# Altium PCB PCB3.PcbDoc
Units mil, origin at the board's own origin, x right, y up, seen from the top; angles counter-clockwise.
Board outline 3774.03 x 2765.94 mil, 2 copper layers (Top Layer, Bottom Layer); 27 components, 30 nets, 112 pads, 2 vias.
Unrouted connection lines stored in the file: 1.
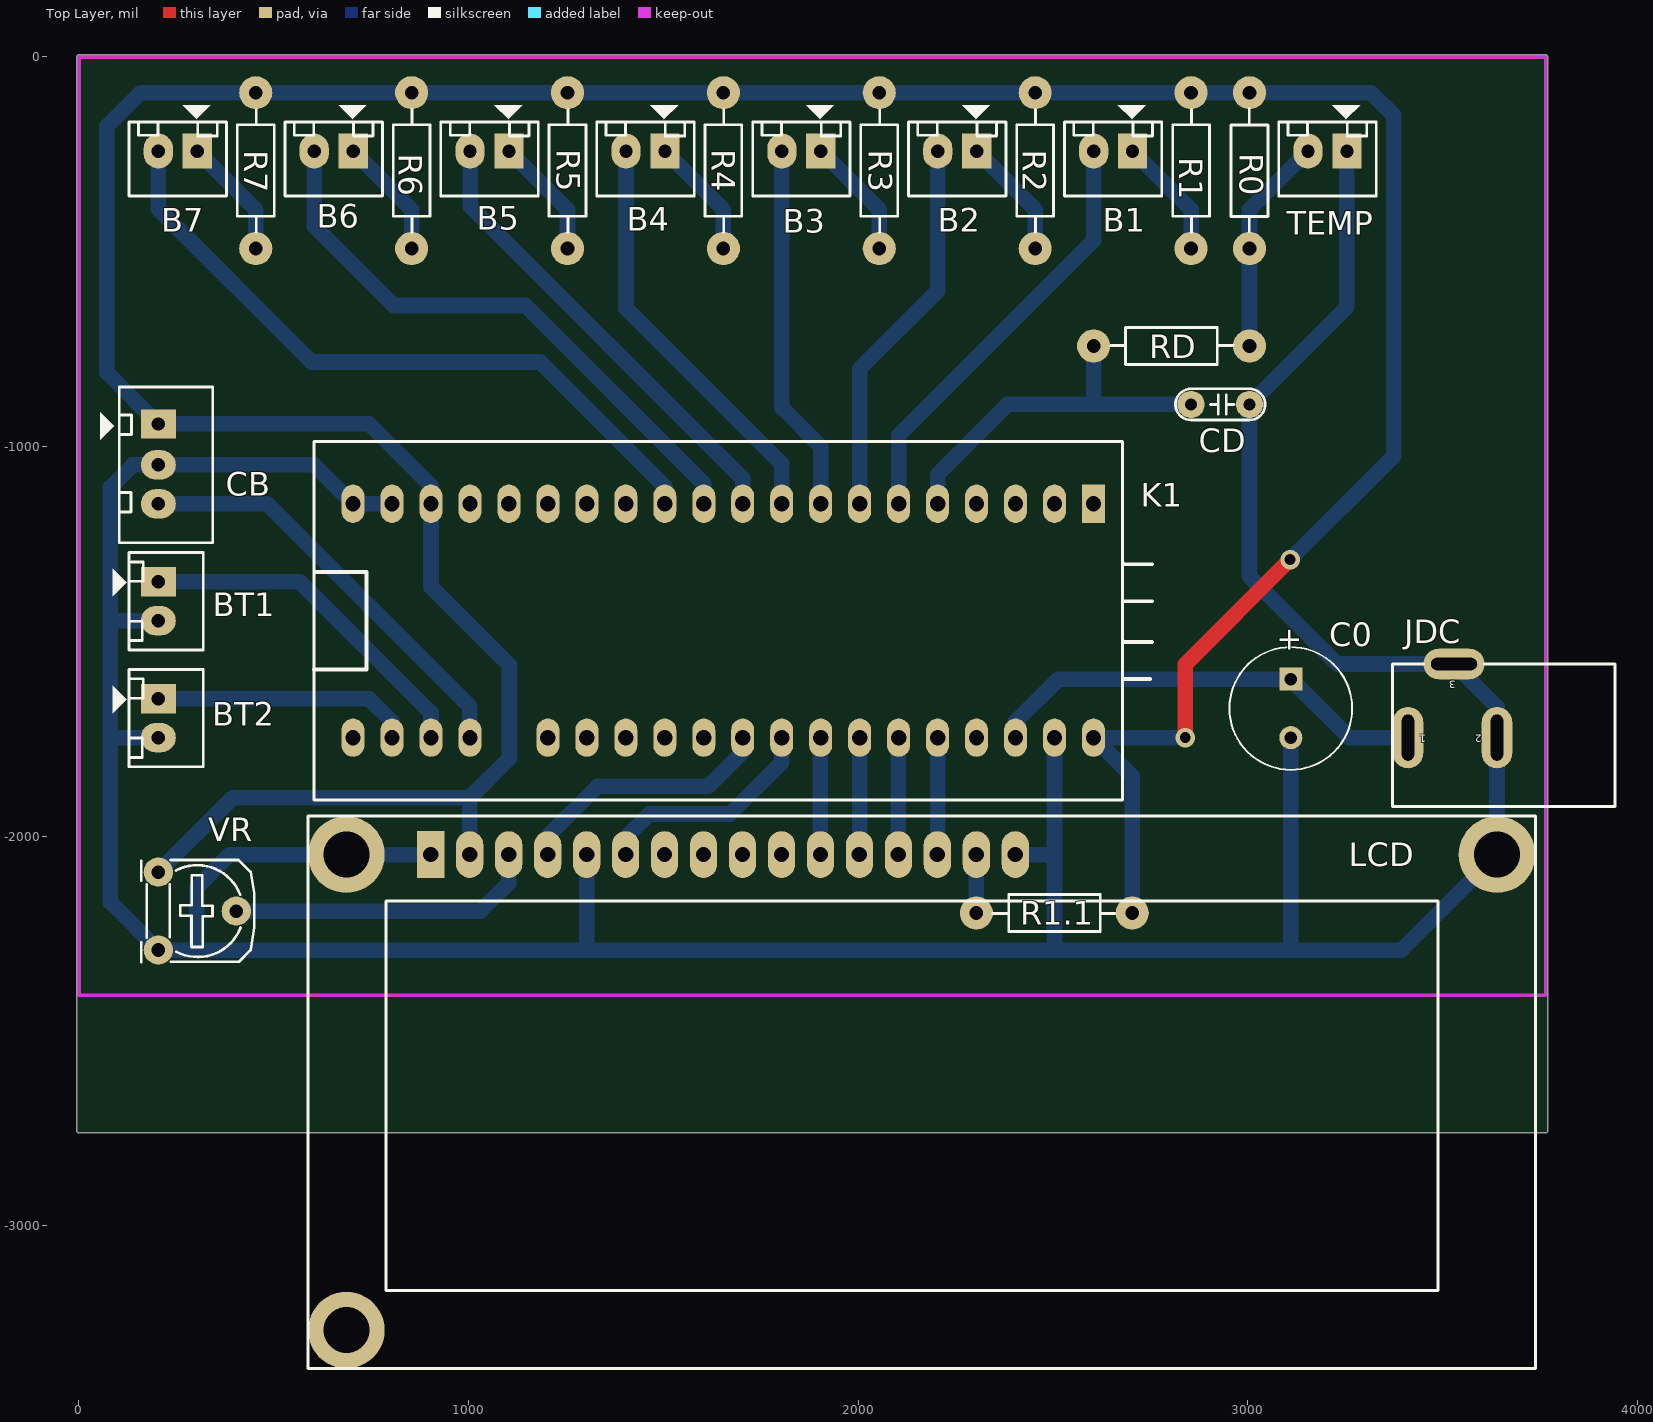
[diagram p0: Top Layer view]
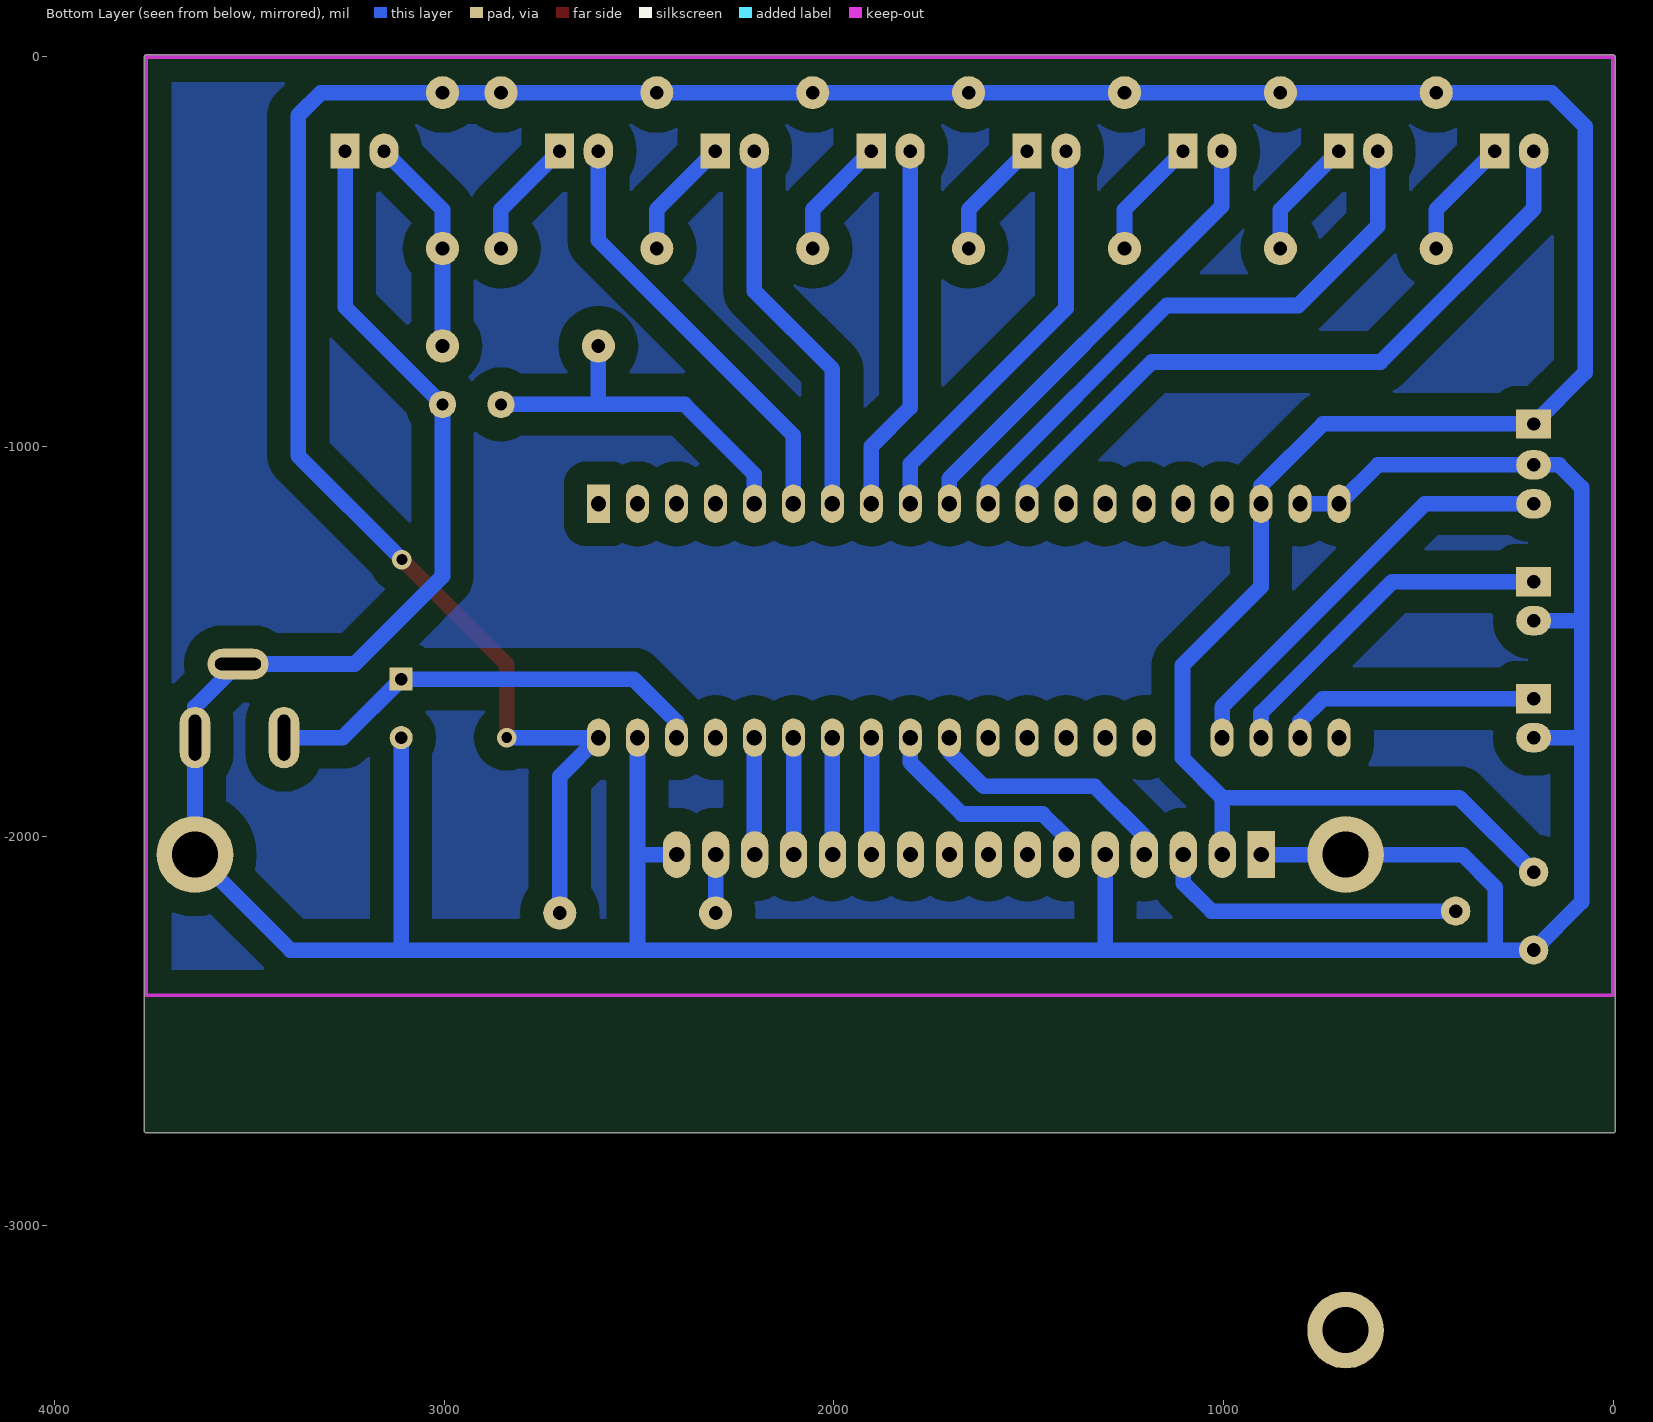
[diagram p1: Bottom Layer view, seen from below]
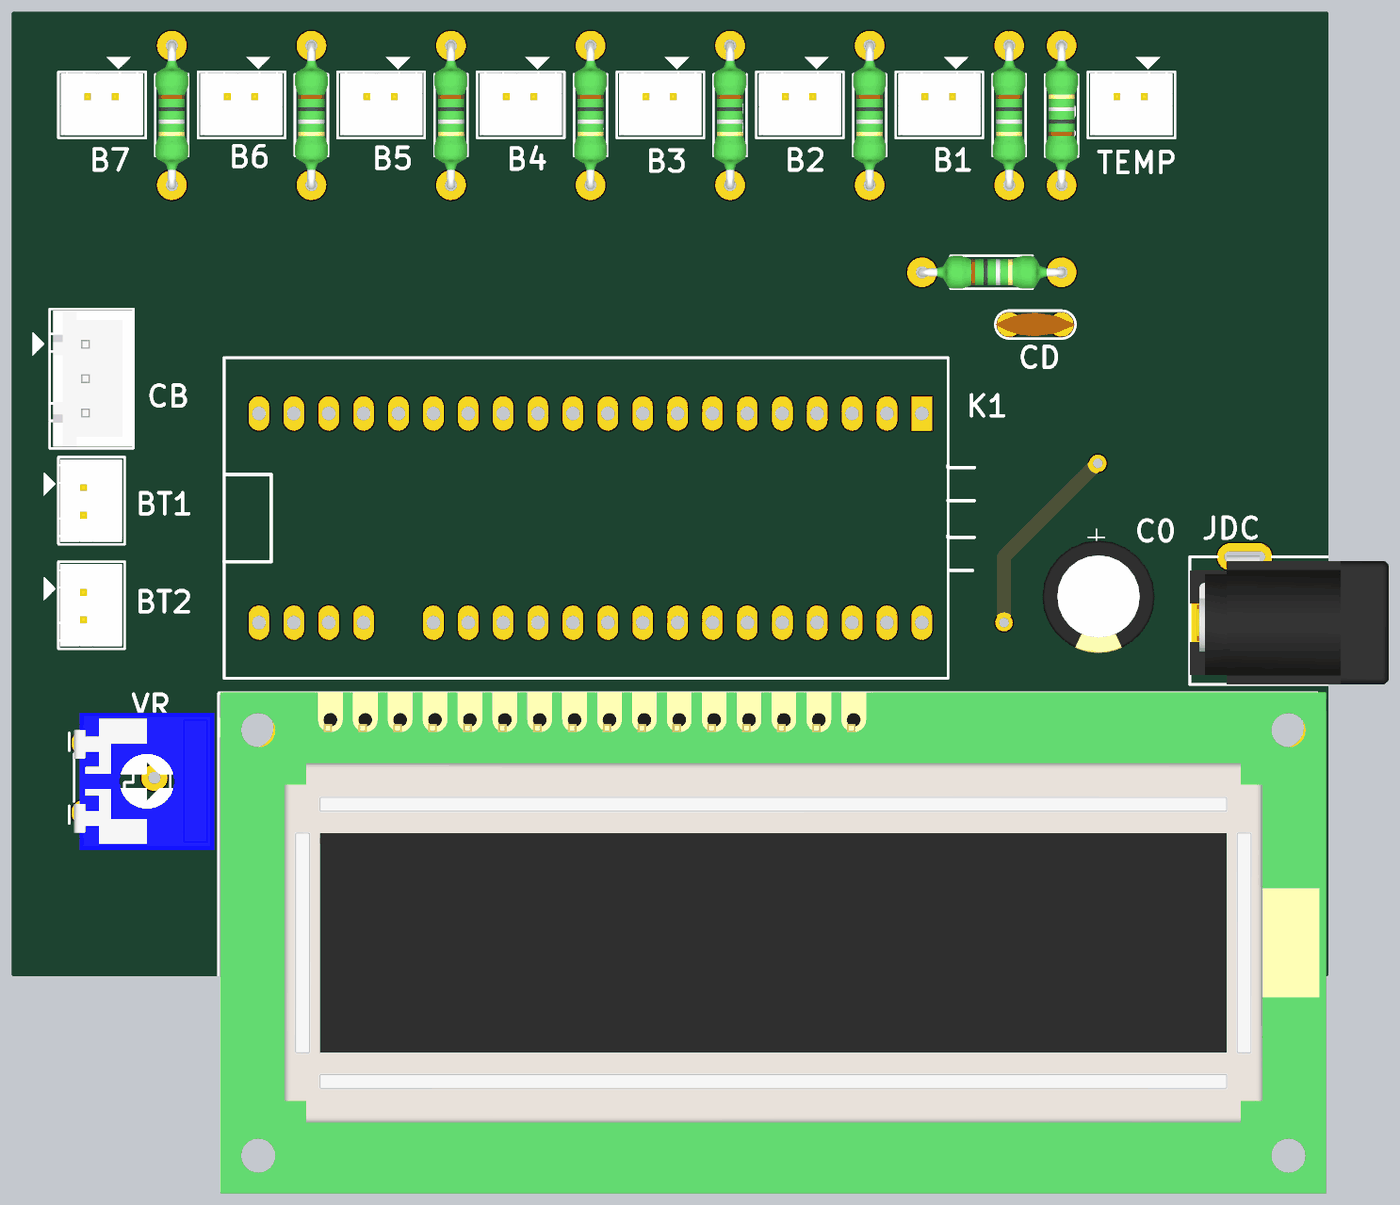
[diagram p2: 3D render of the assembled board from above, using the file's embedded part models]

## Layer stack, top to bottom
Top Solder: solder mask 0.4, Solder Resist, Dk 3.5
Top Layer: signal copper 1.4
Dielectric 1: dielectric 12.6, FR-4, Dk 4.8
Bottom Layer: signal copper 1.4
Bottom Solder: solder mask 0.4, Solder Resist, Dk 3.5

## Board outline
-5.02,-2755.91 ccw(c0,-2755.91) 0,-2760.92 3764,-2760.92 ccw(c3764,-2755.91) 3769.02,-2755.91 3769.02,0 ccw(c3764,0) 3764,5.02 0,5.02 ccw(c0,0) -5.02,0

## Design rules (kind name [scope] priority, off if disabled: settings)
Clearance [All] p1: gap=10 ignorepadtopadclearanceinfootprint=FALSE
PolygonConnect [All] p1: connectstyle=Relief reliefconductorwidth=10 reliefentries=4 polygonreliefangle="90 Angle" airgapwidth=10
RoutingVias [All] p1: holewidth=28 width=50 viastyle="Through Hole" minholewidth=28 minwidth=50 maxholewidth=28 maxwidth=50
SolderMaskExpansion [All] p1: expansion=4
Width [All] p1: maxlimit=40 minlimit=10 preferedwidth=20
30 further rules are at their usual default settings.

## Components (designator, comment, footprint, x,y, rotation, side; value= is the part's Value field where it differs from the comment)
B1 "" Header2 2704,-242 r180 top
B2 "" Header2 2304,-242 r180 top
B3 "" Header2 1904,-242 r180 top
B4 "" Header2 1504,-242 r180 top
B5 "" Header2 1104,-242 r180 top
B6 "" Header2 704,-242 r180 top
B7 "" Header2 304,-242 r180 top
BT1 "" Header2 204,-1347 r270 top
BT2 "" Header2 204,-1647 r270 top
C0 "100" CA-ALU-8 3110,-1672 r270 top value=104
CB "Header3" Header3 204,-947 r270 top
CD "101" CN1.5 2934,-892 r180 top value=33pF
JDC "Jac DC" DC5 3524.83,-1747 r180 top
K1 "STM32F103C8T6 KIT" "STM32F103C8T6 KIT" 2603.59,-1147 r270 top
LCD "LCD 16x2A" LCD16X2 903,-2047 r0 top value=LCD16x2A
R0 "100K" RES-1/4W 2999,-307 r270 top
R1 "1K" RES-1/4W 2859,-277 r90 top
R1.1 "330" RES-1/4W 2518,-2202 r0 top
R2 "1K" RES-1/4W 2459,-277 r90 top
R3 "1K" RES-1/4W 2059,-277 r90 top
R4 "1K" RES-1/4W 1659,-277 r90 top
R5 "1K" RES-1/4W 1259,-277 r90 top
R6 "1K" RES-1/4W 859,-277 r90 top
R7 "1K" RES-1/4W 459,-277 r90 top
RD "10K" RES-1/4W 2789,-737 r180 top
TEMP "" Header2 3254,-242 r180 top
VR "50K" VR-S2 204,-2092 r270 top value="Volume 50k"

## Footprints (in the part's own frame and the unit in brackets; to place one, negate y for a bottom-side part, rotate by r counter-clockwise, add the part's x,y. Pads: shape width x height; smd on the part's side, far side on the other; paste and mask are expansions set on the pad)
CA-ALU-8 [mm] "Polarized capacitors, Aluminum Electrolytic Capacitors, 2-Leads, Body 8x16x3.5x0.5"
  rect 1.5x1.5 hole 0.8: 1(-1.905,0)
  round 1.5 hole 0.8: 2(1.905,0)
  silkscreen extent -4,-4 4,4, body extent -4.1,-4.1 4.1,4.1, height 14.4
CN1.5 [mil]
  round 70 hole 31: 1(-70,0) 2(80,0)
  silkscreen extent -110,-40 120,40, body extent -110,-33 120,33, height 235
DC5 [mm] "WR-DC_DC Power Jack_Right Angled_THT Center Pin ?2.0_Plug ID ?2.05_Plug OD ?5.5"
  oval 2x4 hole 0.8 slot 3 at 90 deg: 1(2.9,0) 2(-2.9,0)
  oval 4x2 hole 0.8 slot 3 at 0 deg: 3(-0.1,-4.8)
  silkscreen extent -10.6,-4.8 3.9,4.5, body extent -10.6,-4.9 3.9,4.5, height 10.7
Header2 [mil] "CON2"
  rect 75x90 hole 34: 1(0,0)
  oval 75x90 hole 34: 2(100,0)
  silkscreen extent -75,-118 175,115, body extent -68,-70 168,107, height 236
Header3 [mil] "CON 3"
  rect 75x90 hole 34: 1(-5,0)
  oval 75x90 hole 34: 2(100,0) 3(200,0)
  silkscreen extent -100,-150 300,140, body extent -95,-90 295,136, height 276
LCD16X2 [mil] "LCD dipslay 16x2, 16 pin"
  round 196.85 hole 118.11: 1(-216.54,-1220.47) 1(-216.54,0) 1(2736.22,0)
  rect 70x120 hole 39.37: 1(0,0)
  oval 70x120 hole 39.37: 2(100,0.02) 3(200,0) 4(300,0) 5(400,0) 6(500,0) 7(600,0) 8(700,0) 9(800,0) 10(900,0) 11(1000,0) 12(1100,0) 13(1200,0) 14(1300,0) 15(1400,0) 16(1500,0)
  round 0 all layers, no hole: ""(-216.54,0)
  silkscreen extent -315,-1319 2835,98, body extent -310,-1337 2860,100, height 714
RES-1/4W [mil]
  round 85 hole 35: 1(-215,5) 2(185,5)
  silkscreen extent -173,-42 141,52, body extent -227,-42 197,52, height 95
"STM32F103C8T6 KIT" [mm]
  rect 2.5x1.5 hole 1: 1(0,0)
  oval 2.5x1.5 hole 1: 2(0,-2.54) 3(0,-5.08) 4(0,-7.62) 5(0,-10.16) 6(0,-12.7) 7(0,-15.24) 8(0,-17.78) 9(0,-20.32) 10(0,-22.86) 11(0,-25.4) 12(0,-27.94) 13(0,-30.48) 14(0,-33.02) 15(0,-35.56) 16(0,-38.1) 17(0,-40.64) 18(0,-43.18) 19(0,-45.72) 20(0,-48.26) 21(15.24,-48.26) 22(15.24,-45.72) 23(15.24,-43.18) 24(15.24,-40.64) 26(15.24,-35.56) 27(15.24,-33.02) 28(15.24,-30.48) 29(15.24,-27.94) 30(15.24,-25.4) 31(15.24,-22.86) 32(15.24,-20.32) 33(15.24,-17.78) 34(15.24,-15.24) 35(15.24,-12.7) 36(15.24,-10.16) 37(15.24,-7.62) 38(15.24,-5.08) 39(15.24,-2.54) 40(15.24,0)
  silkscreen extent -4.06,-50.8 19.3,3.81
VR-S2 [mil] "Resistor Variable"
  round 75 hole 35: 1(0,0) 2(100,200) 3(200,0)
  silkscreen extent -31,-44 231,246, body extent -87,-30 307,372, height 165

## Part data
B1 B2 B3 B4 B5 B6 B7 BT1 BT2 TEMP: library part Header2, "Header IDC, 2 x 1 Pin Vertical 2.54mm Pitch (Non-Boxed, Male)", Manufacturer="Würth Elektronik eiSos GmbH", partNo=613002143121, ComponentLink1 Description=Manufacturer, ComponentLink1URL=http://www.we-online.com, ComponentLink2 Description=Datasheet, ComponentLink2URL=http://katalog.we-online.de/em/datasheet/6130xx143121.pdf, Created by="Karrer Zheng", Created Date="29 March 2013", NoPins=02
C0: library part CN-ALU-DIP, "Capacitor (Semiconductor SIM Model)", LatestRevisionDate=17-Jul-2002, LatestRevisionNote="Re-released for DXP Platform.", PackageReference=C1206, Publisher="Altium Limited"
CB: "Header IDC, 3 x 1 Pin Vertical 2.54mm Pitch (Non-Boxed, Male)", Manufacturer="Würth Elektronik eiSos GmbH", partNo=613002143121, ComponentLink1 Description=Manufacturer, ComponentLink1URL=http://www.we-online.com, ComponentLink2 Description=Datasheet, ComponentLink2URL=http://katalog.we-online.de/em/datasheet/6130xx143121.pdf, Created by="Karrer Zheng", Created Date="29 March 2013", NoPins=02
CD: library part CN
JDC: library part DCIN, "Jac DC input"
LCD: library part LCD16x2A, "LCD dipslay 16 char, 2 line"
R0 R1 R1.1 R2 R3 R4 R5 R6 R7 RD: library part Res, "Res", Manufacturer="Generic Components", Class=Passive, Published=08/06/2000, Publisher="Altium Hobart Technology Centre", SubClass=R
VR: library part VR-S, "Var Resistor"

## Via types
v1: diameter 50, hole 28, Top Layer to Bottom Layer, 2 vias

## Nets (pads, with @x,y where several pads share a name; then routed paths per layer and width w, separated by ;. In a path a pad name is that pad's centre, name@x,y a point inside that pad or via, vN(x,y) a via of type N, cw(c..) or ccw(c..) an arc to the next point about the centre after c; other vN are vias at no path point)
3V3: CB.1 K1.18 K1.40 LCD.2 R0.1 R1.1.2 R1.2 R2.2 R3.2 R4.2 R5.2 R6.2 R7.2 VR.1 | length 9441
  Top Layer w40: v1(2839,-1747) 2839,-1559 v1(3108,-1290)
  Bottom Layer w40: VR.1 395,-1901 1003,-1901 ; LCD.2 1003,-1901 ; R1.1.2 2703,-1846.41 K1.40 v1(2839,-1747) ; v1(3108,-1290) 3374,-1024 3374,-150 3316,-92 R0.1 R1.2 R2.2 R3.2 R4.2 R5.2 R6.2 R7.2 158,-92 72,-178 72,-810 CB.1 745,-942 903.59,-1100.59 K1.18 903.59,-1359.59 1105,-1561 1105,-1799 1003,-1901
5V: C0.1 JDC.1 K1.38 | length 1155.1
  Bottom Layer w40: K1.38 2403.59,-1706.41 2513,-1597 C0.1 3260,-1747 JDC.1
B1: B1.2 K1.6 | length 1112.3
  Bottom Layer w40: K1.6 2103.59,-971.41 2604,-471 B1.2
B2: B2.2 K1.7 | length 988
  Bottom Layer w40: K1.7 2003.59,-801.41 2204,-601 B2.2
B3: B3.2 K1.8 | length 946.3
  Bottom Layer w40: B3.2 1804,-900 1903.59,-999.59 K1.8
B4: B4.2 K1.9 | length 1070.5
  Bottom Layer w40: B4.2 1404,-645 1803.59,-1044.59 K1.9
B5: B5.2 K1.10 | length 1194.8
  Bottom Layer w40: B5.2 1004,-383 1703.59,-1082.59 K1.10
B6: B6.2 K1.11 | length 1517
  Bottom Layer w40: B6.2 604,-434 808,-638 1146,-638 1603.59,-1095.59 K1.11
B7: B7.2 K1.12 | length 1787.2
  Bottom Layer w40: B7.2 204,-390 597,-783 1184,-783 1503.59,-1102.59 K1.12
D4: K1.33 LCD.11 | length 300.2
  Bottom Layer w40: LCD.11 1903,-1747.59 K1.33
D5: K1.34 LCD.12 | length 300.2
  Bottom Layer w40: LCD.12 2003.59,-2046.41 K1.34
D6: K1.35 LCD.13 | length 300.2
  Bottom Layer w40: LCD.13 2103,-1747.59 K1.35
D7: K1.36 LCD.14 | length 300.2
  Bottom Layer w40: LCD.14 2203.59,-2046.41 K1.36
EN: K1.32 LCD.6 | length 587.2
  Bottom Layer w40: LCD.6 1403,-2004 1464,-1943 1671,-1943 1803.59,-1810.41 K1.32
GND: BT1.2 BT2.2 C0.2 CB.2 CD.1 JDC.2 JDC.3 K1.19 K1.20 K1.39 LCD.1 LCD.5 LCD.16 TEMP.1 VR.3 | length 10389.4
  Bottom Layer w40: BT2.2 81,-1747 ; BT1.2 81,-1447 ; K1.19 K1.20 603.59,-1047 CB.2 139,-1047 81,-1105 81,-1447 ; LCD.1@903,-2047 686.46,-2047 387,-2047 303,-2131 303,-2292 ; LCD.5 1303,-2287 1308,-2292 ; LCD.16 2503.59,-2047 ; K1.39 2503.59,-2047 ; C0.2 3110,-2292 ; TEMP.1 3254,-642 CD.1 3004,-1333 3229.02,-1558.02 JDC.3 3639,-1668.26 JDC.2 3639,-2046.78 3639.22,-2047 3394.22,-2292 3110,-2292 ; 81,-1747 81,-1447 ; 81,-1747 81,-2169 VR.3 303,-2292 ; 303,-2292 1308,-2292 ; 1308,-2292 2503.59,-2292 ; 2503.59,-2292 3110,-2292 ; 2503.59,-2292 2503.59,-2047
NetB1_1: B1.1 R1.1 | length 312.1
  Bottom Layer w40: B1.1 2854,-392 R1.1
NetB2_1: B2.1 R2.1 | length 312.1
  Bottom Layer w40: B2.1 2454,-392 R2.1
NetB3_1: B3.1 R3.1 | length 312.1
  Bottom Layer w40: B3.1 2054,-392 R3.1
NetB4_1: B4.1 R4.1 | length 312.1
  Bottom Layer w40: B4.1 1654,-392 R4.1
NetB5_1: B5.1 R5.1 | length 312.1
  Bottom Layer w40: B5.1 1254,-392 R5.1
NetB6_1: B6.1 R6.1 | length 312.1
  Bottom Layer w40: B6.1 854,-392 R6.1
NetB7_1: B7.1 R7.1 | length 312.1
  Bottom Layer w40: B7.1 454,-392 R7.1
NetBT1_1: BT1.1 K1.23 | length 902.4
  Bottom Layer w40: BT1.1 567,-1347 903.59,-1683.59 K1.23
NetBT2_1: BT2.1 K1.22 | length 665.3
  Bottom Layer w40: BT2.1 745,-1647 803.59,-1705.59 K1.22
NetCB_3: CB.3 K1.24 | length 1094.6
  Bottom Layer w40: CB.3 483,-1147 1003.59,-1667.59 K1.24
NetLCD_3: LCD.3 VR.2 | length 801.8
  Bottom Layer w40: VR.2 1031,-2192 1103,-2120 LCD.3
NetLCD_15: LCD.15 R1.1.1 | length 150
  Bottom Layer w40: R1.1.1 LCD.15
NetR0_2: R0.2 RD.1 TEMP.2 | length 562.1
  Bottom Layer w40: RD.1 R0.2 3004,-392 TEMP.2
RS: K1.31 LCD.4 | length 673.7
  Bottom Layer w40: LCD.4 1203,-2000 1331,-1872 1615,-1872 1703.59,-1783.41 K1.31
TEMP: CD.2 K1.5 RD.2 | length 954.5
  Bottom Layer w40: K1.5 2203.59,-1071.41 2383,-892 2594,-892 ; RD.2 2604,-882 2594,-892 ; CD.2 2594,-892
pads on no net: K1.1 K1.2 K1.3 K1.4 K1.13 K1.14 K1.15 K1.16 K1.17 K1.21 K1.26 K1.27 K1.28 K1.29 K1.30 K1.37 LCD. LCD.7 LCD.8 LCD.9 LCD.10

## Polygon pours and split planes (outlines as drawn)
no net on Bottom Layer "Bottom Layer-No Net" (solid, pour order 0): 3764,-2408 3764,0 0,0 0,-2408

## Keep-outs
Keep-Out Layer:
  lines w10: 0,-2408 3764,-2408 3764,0 0,0 0,-2408

## Text inside footprints (layer, text, board x,y; h text height)
C0: Top Overlay "+" at 3080.98,-1462.35 h59.06 r270
JDC: Top Overlay "1" at 3457.9,-1739.13 h19.68 r180; Top Overlay "2" at 3599.63,-1739.13 h19.68 r180; Top Overlay "3" at 3532.7,-1601.33 h19.68 r180